# Altium PCB PCBII_COPY.PcbDoc (part 1 of 2)
Units mil, origin at the board's own origin, x right, y up, seen from the top; angles counter-clockwise.
Board outline 1365 x 1450 mil, 2 copper layers (Top Layer, Bottom Layer); 54 components, 41 nets, 198 pads, 63 vias.
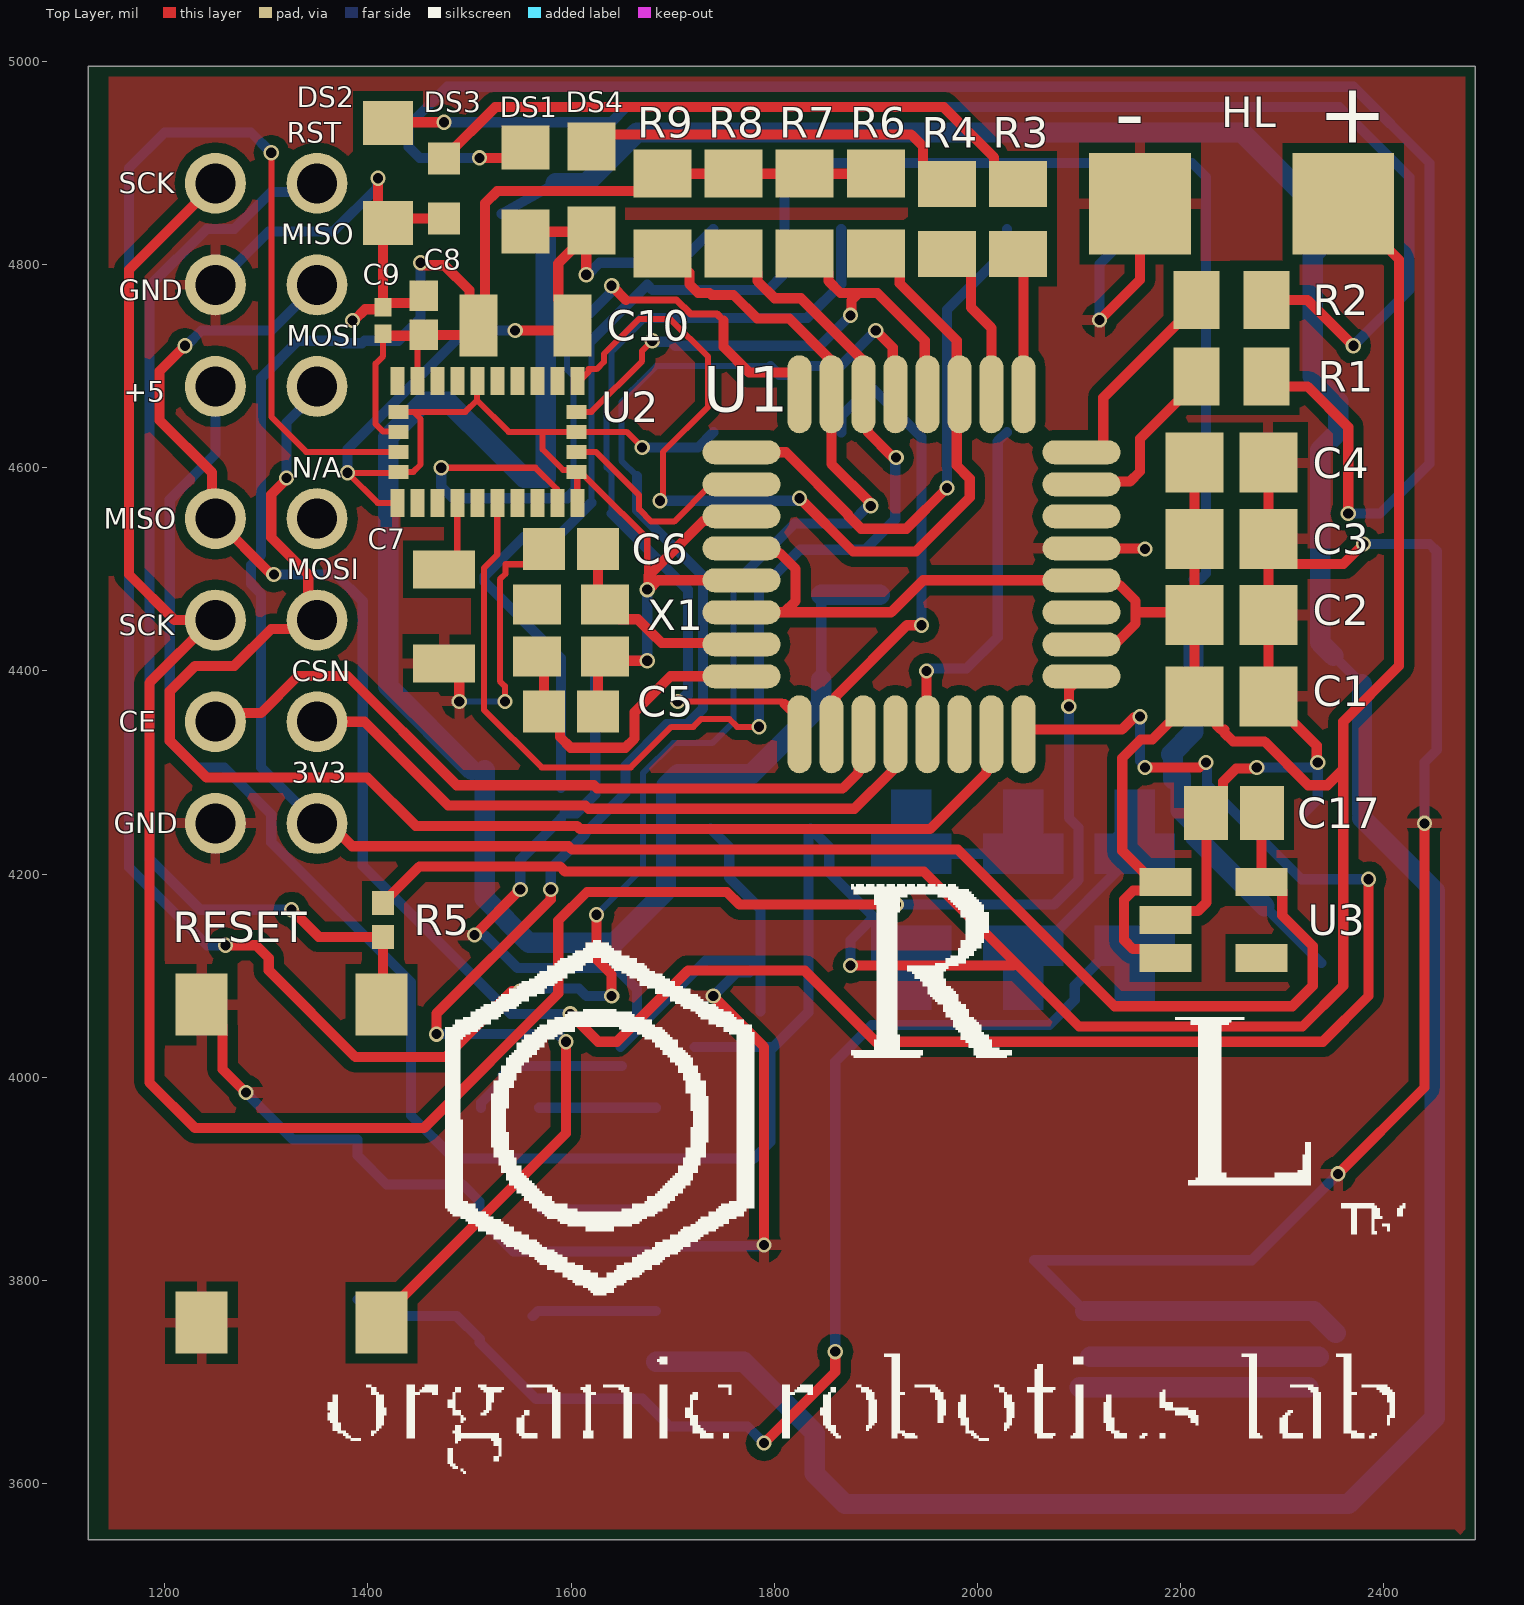
[diagram p0: Top Layer view]
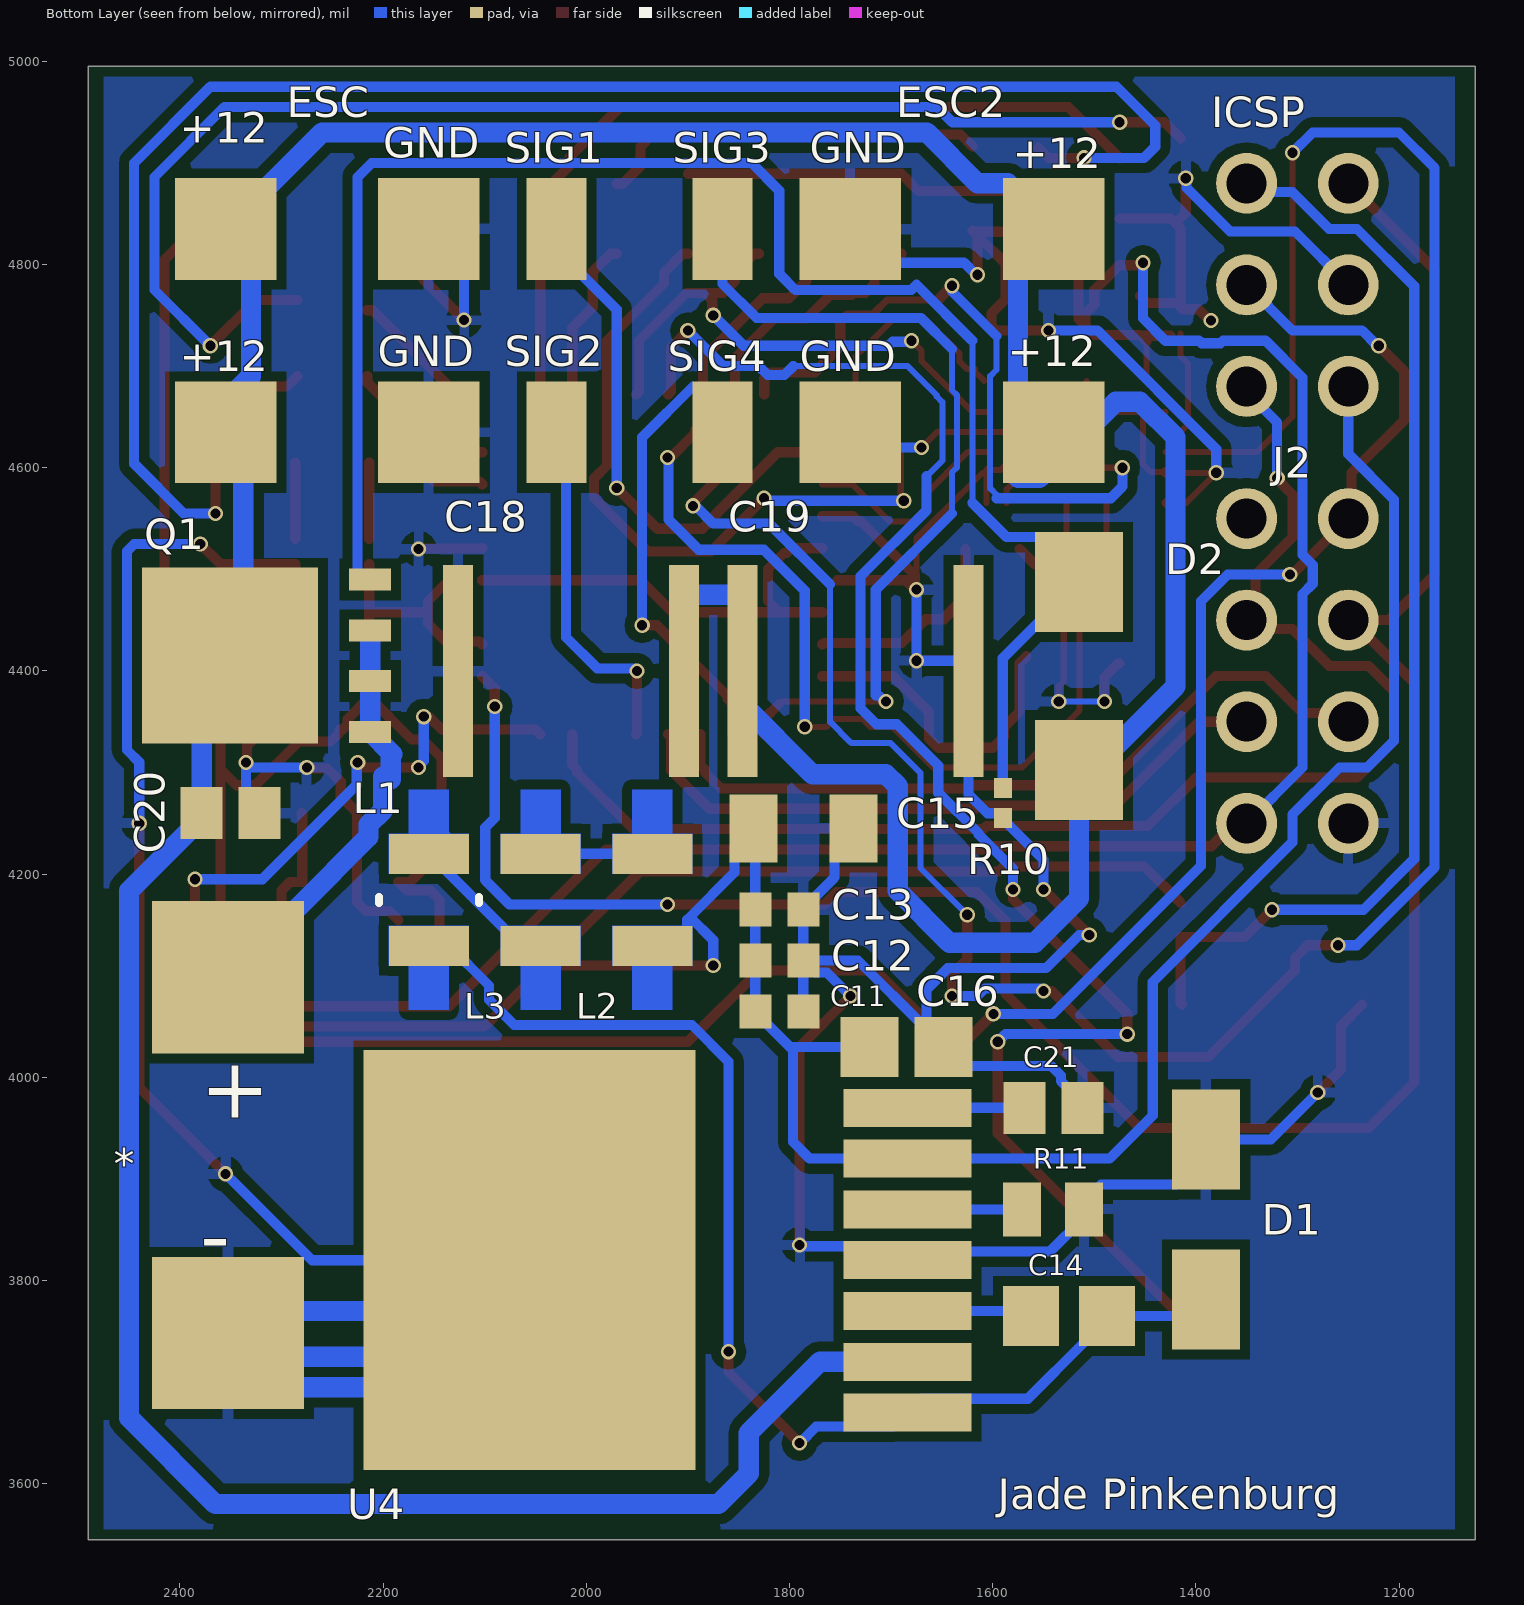
[diagram p1: Bottom Layer view, seen from below]

## Layer stack, top to bottom
Top Solder: solder mask 0.4, Solder Resist, Dk 3.5
Top Layer: signal copper 1.4
Dielectric 1: dielectric 12.6, FR-4, Dk 4.8
Bottom Layer: signal copper 1.4
Bottom Solder: solder mask 0.4, Solder Resist, Dk 3.5

## Board outline
2490,4995 2490,3545 1125,3545 1125,4995

## Design rules (kind name [scope] priority, off if disabled: settings)
Clearance [All] p1: gap=10 ignorepadtopadclearanceinfootprint=FALSE except(0: Arc-Hole Track-Hole SMDPad-Hole THPad-Hole Via-Hole Fill-Hole Poly-Hole Region-Hole Text-Hole; 5: Arc-Arc Arc-Track Arc-SMDPad Track-Track Track-SMDPad SMDPad-SMDPad)
MinimumSolderMaskSliver [All] p1: minsoldermaskwidth=3.5
PolygonConnect [All] p1: connectstyle=Relief reliefconductorwidth=10 reliefentries=4 polygonreliefangle="90 Angle" airgapwidth=10
RoutingVias [All] p1: holewidth=28 width=50 viastyle="Through Hole" minholewidth=28 minwidth=50 maxholewidth=28 maxwidth=50
SilkToSilkClearance [All] p1: silktosilkclearance=6
SilkToSolderMaskClearance [IsPad] p1: minsilkscreentomaskgap=6 clearancetoexposedcopper=TRUE
SolderMaskExpansion [All] p1: expansion=1
Width [All] p1: maxlimit=20 minlimit=5 preferedwidth=10 minimp=50.000000 maximp=50.000000 favimp=50.000000
27 further rules are at their usual default settings.

## Classes and differential pairs
component class [06]-Headers: * ESC ESC2 HL ICSP J2
component class [04]-Power: C11 C12 C13 C14 C15 C16 C17 C18 C19 C20 C21 D1 D2 L1 L2 L3 Q1 R10 R11 U3 U4
component class [03]-IMU: C7 C8 C9 C10 R6 R7 R8 R9 U2
component class [02]-IC: C1 C2 C3 C4 C5 C6 DS1 DS2 DS3 DS4 R1 R2 R3 R4 R5 RESET U1 X1

## Components (designator, comment, footprint, x,y, rotation, side; value= is the part's Value field where it differs from the comment)
* "Power Pads" Power_Switch 2360,3925 r90 bottom
C1 "0.1uF" CAPC2013X70X50ML10T25 2250,4375 r180 top
C2 "0.1uF" CAPC2013X70X50ML10T25 2250,4455 r180 top
C3 "0.1uF" CAPC2013X70X50ML10T25 2250,4530 r180 top
C4 "0.1uF" CAPC2013X70X50ML10T25 2250,4605 r180 top
C5 "22pF" CAPC1608X90X40ML10T20 1600,4360 r180 top
C6 "22pF" CAPC1608X90X40ML10T20 1600,4520 r180 top
C7 "C2012X7R2A104K125AA" CAPC2013X145X20ML20 1475,4453.74 r270 top
C8 "GRM155R71H123KA12D" CAPC1005X55X25ML05T10 1455,4750 r270 top value="120 nF"
C9 "GRM033R71A682KA01D" CAPC0603X33X15NL03T05 1415,4745 r270 top value="6.8 nF"
C10 "C2012X7R2A104K125AA" CAPC2013X145X20ML20 1555,4740 r180 top
C11 "10 uF" CAPC1608X90X38LL10T18 1810,4065 r180 bottom
C12 "10 uF" CAPC1608X90X38LL10T18 1810,4115 r180 bottom
C13 "10 uF" CAPC1608X90X38LL10T18 1810,4165 r180 bottom
C14 "10 nF" CAPC2013X70X45ML10T25 1525,3765 r180 bottom
C15 "150 uF" CAPC3216X180X50LL20T30 1786.38,4245 r180 bottom
C16 "0.1uF" CAPC2013X70X50ML10T25 1685,4030 r0 bottom
C17 "10uF" CAPC2013X145X50LL20T25 2252.56,4260 r0 top
C18 "15 uF" CAPC5750X280X20LL40 2015,4400 r180 bottom
C19 "15 uF" CAPC5750X280X20LL40 1735,4400 r0 bottom
C20 ".47 uF" CAPC2013X95X50LL10T25 2350,4260 r180 bottom
C21 "1 nF" CAPC2013X70X50LL10T25 1540,3970 r0 bottom
D1 "Diode" DIOD-SMA-2_A_V 1390,3860 r270 bottom
D2 "12V Zener Diode" FAIR-DO-214AA-2_V 1515,4395 r270 bottom
DS1 "BLUE LED" 0805_A 1555,4873.66 r90 top
DS2 "Orange" LTST-C171AKT_V 1420,4890 r270 top
DS3 "GREEN LED" LITE-ON-LTST-C191KRKT-2_V 1475,4875 r270 top
DS4 "Red Adj" LTST-C170KRKT_V 1620,4875 r270 top
ESC "ESCs" "ESC Pads" 2255,4735 r90 bottom
ESC2 "More ESCs" "ESC Pads" 1640,4735 r270 bottom
HL "Headlights" Headlamps 2260,4860 r0 top
ICSP "ICSP" ICSP 1300,4780 r90 bottom
J2 "Wifi" Wifi 1300,4500 r0 bottom
L1 "10 uH" MURA-LQH32CN100K53 2155,4174.72 r270 bottom
L2 "10 uH" MURA-LQH32CN100K53 1935,4174.72 r270 bottom
L3 "10 uH" MURA-LQH32CN100K53 2045,4174.72 r90 bottom
Q1 "P-FET 12V" NXP-SOT669_M 2315,4415 r0 bottom
R1 "270 Ohm" RESC2013X50X40NL20T20 2250,4690 r0 top
R2 "270 Ohm" RESC2013X50X40NL20T20 2250,4765 r0 top
R3 "270 Ohm" RESC2013X50X40NL20T20 2040,4845 r90 top
R4 "270 Ohm" RESC2013X50X40NL20T20 1970,4845 r90 top
R5 "1k" RESC1005X40X25NL05T10 1415,4155 r270 top
R6 "RC0805JR-0710KL" RESC2013X60X35ML10T20 1900,4850 r90 top
R7 "RC0805JR-0710KL" RESC2013X60X35ML10T20 1830,4850 r90 top
R8 "RC0805JR-0710KL" RESC2013X60X35ML10T20 1760,4850 r270 top
R9 "RC0805JR-0710KL" RESC2013X60X35ML10T20 1690,4850 r270 top
R10 "10k" RESC1005X40X25LL05T10 1590,4270 r90 bottom
R11 "8.2 k" RESC2013X50X40LL20T20 1540.51,3870 r0 bottom
RESET "Button" CKCP-PTS645S_V 1325,3915 r270 top
U1 "ATMEGA328P" 32A_M 1935,4505 r0 top
U2 "BNO055" BOSC-LGA-28_M 1517.6,4625.47 r0 top
U3 "3.3V Regulator" MF05A_M 2232.24,4155 r0 top
U4 "5V Buck" TS7B_N 1920,3820 r0 bottom
X1 "16MHz" AVX-CX2520DB_V 1600,4440 r0 top

## Footprints (in the part's own frame and the unit in brackets; to place one, negate y for a bottom-side part, rotate by r counter-clockwise, add the part's x,y. Pads: shape width x height; smd on the part's side, far side on the other; paste and mask are expansions set on the pad)
32A_M [mm] "Thin QFP, 32-Leads, Body 7x7mm, Pitch 0.8mm, IPC Low Density"
  oval 1.95x0.6 smd: 1(-4.25,2.8) 2(-4.25,2) 3(-4.25,1.2) 4(-4.25,0.4) 5(-4.25,-0.4) 6(-4.25,-1.2) 7(-4.25,-2) 8(-4.25,-2.8) 17(4.25,-2.8) 18(4.25,-2) 19(4.25,-1.2) 20(4.25,-0.4) 21(4.25,0.4) 22(4.25,1.2) 23(4.25,2) 24(4.25,2.8)
  oval 0.6x1.95 smd: 9(-2.8,-4.25) 10(-2,-4.25) 11(-1.2,-4.25) 12(-0.4,-4.25) 13(0.4,-4.25) 14(1.2,-4.25) 15(2,-4.25) 16(2.8,-4.25) 25(2.8,4.25) 26(2,4.25) 27(1.2,4.25) 28(0.4,4.25) 29(-0.4,4.25) 30(-1.2,4.25) 31(-2,4.25) 32(-2.8,4.25)
  body extent -3.5,-3.5 3.5,3.5, height 1.2
0805_A [mm] "Chip LED, 2-Leads, Body 2.0x1.3mm, IPC Medium Density"
  rect 1.1x1.2 smd: 1(-1.05,0) 2(1.05,0)
  body extent -1,-0.62 1,0.63, height 0.68
AVX-CX2520DB_V [mm] "SMD, 4-Leads, Body 2.5x2mm, Pitch 1.7mm"
  rect 1.2x1 smd: 1(-0.85,-0.65) 2(0.85,-0.65) 3(0.85,0.65) 4(-0.85,0.65)
  body extent -1.25,-1 1.25,1, height 0.55
BOSC-LGA-28_M [mm] "PQFN, 28-Leads, Body 5.20x3.80mm, Pitch 0.50mm, IPC Low Density"
  rect 0.35x0.7 smd: 1(-2.25,1.525) 6(-2.25,-1.525) 7(-1.75,-1.525) 8(-1.25,-1.525) 9(-0.75,-1.525) 10(-0.25,-1.525) 11(0.25,-1.525) 12(0.75,-1.525) 13(1.25,-1.525) 14(1.75,-1.525) 15(2.25,-1.525) 20(2.25,1.525) 21(1.75,1.525) 22(1.25,1.525) 23(0.75,1.525) 24(0.25,1.525) 25(-0.25,1.525) 26(-0.75,1.525) 27(-1.25,1.525) 28(-1.75,1.525)
  rect 0.5x0.35 smd: 2(-2.225,0.75) 3(-2.225,0.25) 4(-2.225,-0.25) 5(-2.225,-0.75) 16(2.225,-0.75) 17(2.225,-0.25) 18(2.225,0.25) 19(2.225,0.75)
  body extent -2.6,-1.9 2.6,1.9, height 1.18
CAPC0603X33X15NL03T05 [mm] "Chip Capacitor, 2-Leads, Body 0.60x0.30mm, IPC Medium Density"
  rect 0.46x0.42 smd: 1(-0.33,0) 2(0.33,0)
  body extent -0.31,-0.17 0.32,0.16, height 0.33
CAPC1005X55X25ML05T10 [mm] "Chip Capacitor, 2-Leads, Body 1.00x0.50mm, IPC Low Density"
  rect 0.76x0.72 smd: 1(-0.49,0) 2(0.49,0)
  body extent -0.53,-0.28 0.53,0.27, height 0.55
CAPC1608X90X38LL10T18 [mm] "Chip Capacitor, 2-Leads, Body 1.7x0.9mm, IPC High Density"
  rect 0.8x0.85 smd: 1(-0.6,0) 2(0.6,0)
  body extent -0.85,-0.45 0.85,0.45, height 0.9
CAPC1608X90X40ML10T20 [mm] "Chip Capacitor, 2-Leads, Body 1.7x0.9mm, IPC Low Density"
  rect 1.05x1.05 smd: 1(-0.675,0) 2(0.675,0)
  body extent -0.85,-0.45 0.85,0.45, height 0.9
CAPC2013X70X45ML10T25 [mm] "Chip Capacitor, 2-Leads, Body 2.00x1.25mm, IPC Low Density"
  rect 1.4x1.5 smd: 1(-0.95,0) 2(0.95,0)
  body extent -1.05,-0.67 1.05,0.67, height 0.7
CAPC2013X70X50LL10T25 [mm] "Chip Capacitor, 2-Leads, Body 2.10x1.35mm, IPC High Density"
  rect 1.05x1.3 smd: 1(-0.725,0) 2(0.725,0)
  body extent -1.05,-0.67 1.05,0.67, height 0.7
CAPC2013X70X50ML10T25 [mm] "Chip Capacitor, 2-Leads, Body 2.10x1.35mm, IPC Low Density"
  rect 1.45x1.5 smd: 1(-0.925,0) 2(0.925,0)
  body extent -1.05,-0.67 1.05,0.67, height 0.7
CAPC2013X95X50LL10T25 [mm] "Chip Capacitor, 2-Leads, Body 2.10x1.35mm, IPC High Density"
  rect 1.05x1.3 smd: 1(-0.725,0) 2(0.725,0)
  body extent -1.05,-0.68 1.05,0.67, height 0.95
CAPC2013X145X20ML20 [mm] "Chip Capacitor, 2-Leads, Body 2.20x1.45mm, IPC Low Density"
  rect 0.95x1.55 smd: 1(-1.175,0) 2(1.175,0)
  body extent -1.1,-0.72 1.1,0.72, height 1.45
CAPC2013X145X50LL20T25 [mm] "Chip Capacitor, 2-Leads, Body 2.00x1.25mm, IPC High Density"
  rect 1.1x1.35 smd: 1(-0.7,0) 2(0.7,0)
  body extent -1.1,-0.72 1.1,0.72, height 1.45
CAPC3216X180X50LL20T30 [mm] "Chip Capacitor, 2-Leads, Body 3.4x1.8mm, IPC High Density"
  rect 1.2x1.7 smd: 1(-1.25,0) 2(1.25,0)
  body extent -1.7,-0.9 1.7,0.9, height 1.8
CAPC5750X280X20LL40 [mm] "Chip Capacitors, 2-Leads, Body 6.1x5.4mm, IPC High Density"
  rect 0.75x5.3 smd: 1(-2.825,0) 2(2.825,0)
  body extent -3.05,-2.7 3.05,2.7, height 2.8
CKCP-PTS645S_V [mm] "THD, 4-Leads, Body 6x6mm, Pitch 4.5mm"
  rect 1.55x1.3 smd: 1(-3.975,2.25) 2(3.975,2.25) 3(-3.975,-2.25) 4(3.975,-2.25)
  body extent -4.5,-3 4.5,3, height 4.3
DIOD-SMA-2_A_V [mm] "SMA, 2-Leads, Body 4.3x2.605mm"
  rect 2.5x1.7 smd: 1(-2,0) 2(2,0)
  body extent -2.52,-1.46 2.52,1.46, height 2.4
"ESC Pads" [mm]
  rect 2.54x2.54 smd: 1(-2.54,2.54) 2(2.54,2.54) 3(-2.54,-2.54) 4(2.54,-2.54)
  rect 2.54x1.5 smd: 5(-2.54,-5.738) 6(2.54,-5.738)
FAIR-DO-214AA-2_V [mm] "Molded Diode, 2-Leads, Body 4.75x3.95mm"
  rect 2.5x2.2 smd: 1(-2.35,0) 2(2.35,0)
  body extent -2.59,-1.97 2.6,1.98, height 2.65
Headlamps [mil]
  rect 100x100 smd: 1(-100,0) 2(100,0)
ICSP [mil]
  round 60 hole 39.37: 1(-100,-50) 2(-100,50) 3(0,-50) 4(0,50) 5(100,-50) 6(100,50)
LITE-ON-LTST-C191KRKT-2_V [mm] "Chip, 2-Leads, Body 1.6x0.8mm"
  rect 0.8x0.8 smd: 1(-0.75,0) 2(0.75,0)
  body extent -0.8,-0.4 0.8,0.4, height 0.55
LTST-C170KRKT_V [mm] "SMD, 2-Leads, Body 2x1.25mm"
  rect 1.2x1.2 smd: 1(-1.05,0) 2(1.05,0)
  body extent -1,-0.63 1,0.63, height 1.2
LTST-C171AKT_V [mm] "SMD, 2-Leads, Body 2x1.25mm"
  rect 1.1x1.25 smd: 1(-1.25,0) 2(1.25,0)
  body extent -1,-0.63 1,0.63, height 0.8
MF05A_M [mm] "SOT23, 5-Leads, Body 2.9x1.6mm, Pitch 0.95mm, Lead Span 2.8mm, IPC Low Density"
  rect 1.3x0.7 smd: 1(-1.2,0.95) 2(-1.2,0) 3(-1.2,-0.95) 4(1.2,-0.95) 5(1.2,0.95)
  body extent -0.83,-1.49 0.83,1.5, height 1.19
MURA-LQH32CN100K53 [mm] "SMD, 2-Leads, Body 3.2x2.5mm"
  rect 1x2 smd: 1(-1.15,0) 2(1.15,0)
  Top Layer region: -1.65,1 -0.65,1 -0.65,-1 -1.65,-1 -1.65,-0.5 -2.75,-0.5 -2.75,0.5 -1.65,0.5
  Top Layer region: 1.65,-1 0.65,-1 0.65,1 1.65,1 1.65,0.5 2.75,0.5 2.75,-0.5 1.65,-0.5
  silkscreen extent -0.08,-1.25 0.08,1.25, body extent -1.6,-1.25 1.6,1.25, height 1.7
NXP-SOT669_M [mm] "DPAK, 4-Leads, Body 5x4.1mm, Pitch 1.27mm, IPC Low Density"
  rect 1.05x0.55 smd: 1(-2.6,1.905) 2(-2.6,0.635) 3(-2.6,-0.635) 4(-2.6,-1.905)
  rect 4.4x4.4 smd: 5(0.9,0)
  body extent -1.9,-2.5 2.2,2.5, height 1.2
Power_Switch [mil]
  rect 150x150 smd: 1(-176.66,-7.4) 2(173.34,-7.4)
RESC1005X40X25LL05T10 [mm] "Chip Resistor, 2-Leads, Body 1.00x0.50mm, IPC High Density"
  rect 0.5x0.45 smd: 1(-0.375,0) 2(0.375,0)
  body extent -0.53,-0.27 0.53,0.28, height 0.4
RESC1005X40X25NL05T10 [mm] "Chip Resistor, 2-Leads, Body 1.00x0.50mm, IPC Medium Density"
  rect 0.6x0.55 smd: 1(-0.425,0) 2(0.425,0)
  body extent -0.53,-0.27 0.53,0.28, height 0.4
RESC2013X50X40LL20T20 [mm] "Chip Resistor, 2-Leads, Body 2.00x1.25mm, IPC High Density"
  rect 0.95x1.35 smd: 1(-0.775,0) 2(0.775,0)
  body extent -1.1,-0.72 1.1,0.72, height 0.5
RESC2013X50X40NL20T20 [mm] "Chip Resistor, 2-Leads, Body 2.00x1.25mm, IPC Medium Density"
  rect 1.15x1.45 smd: 1(-0.875,0) 2(0.875,0)
  body extent -1.1,-0.72 1.1,0.72, height 0.5
RESC2013X60X35ML10T20 [mm] "Chip Resistor, 2-Leads, Body 2.1x1.35mm, IPC Low Density"
  rect 1.2x1.45 smd: 1(-1,0) 2(1,0)
  body extent -1.05,-0.68 1.05,0.67, height 0.6
TS7B_N [mm] "D2-PAK, 8-Leads, Body 8.6x10.2mm, Pitch 1.27mm, Lead Span 14.1mm, IPC Medium Density"
  rect 3.2x0.95 smd: 1(-6,3.81) 2(-6,2.54) 3(-6,1.27) 4(-6,0) 5(-6,-1.27) 6(-6,-2.54) 7(-6,-3.81)
  rect 8.3x10.5 smd: 8(3.45,0)
  body extent -2.65,-5.2 6.24,5.2, height 4.64
Wifi [mil]
  round 60 hole 39.37: 1(-50,250) 2(50,250) 3(-50,150) 4(50,150) 5(-50,50) 6(50,50) 7(-50,-50) 8(50,-50)

## Part data
C1 C2 C3 C4 C16: library part CMP-2000-05001-1, "Chip Capacitor, 0.1 uF, -20% to 80%, 50 V, -30 to 85 degC, 0805 (2012 Metric), RoHS, Tape and Reel", Capacitance=0.1µF, Manufacturer=Yageo, MPN=CC0805ZRY5V9BB104, Operating Temperature=-30degC~85degC, Package / Case=0805(2012Metric), Package Description="2-Pin Surface Mount Device, Body 2 x 1.25 mm", Package Reference="0805 (2012 Metric)", Ratings=-, Standard Package=1, Temperature Coefficient=Y5V(F), Tolerance=-20%,+80%, Voltage - Rated=50V, Applications=GeneralPurpose, Catalog Drawings=CC_0805_0.6, Category=Capacitors, Datasheet URL=http://download.siliconexpert.com/pdfs/2012/8/14/1/40/50/201/yageo_/manual/upy-gphc_y5v_6.3v-to-50v_5_revised.pdf, Datasheet Version="Rev. 5, 07/2010", Family=CeramicCapacitors, Featured Product=CommodityMultilayerCeramicCapacitors–CCSeries, Features=-, Height - Seated (Max)=-, Lead Spacing=-, Lead Style=-, Manufacturer URL=http://www.yageo.com/, Mounting Type=SurfaceMount,MLCC, Online Catalog=CCSeries, Other Names=311-1361-6, Packaging=Digi-Reel, Series=CC
C5 C6: library part CMP-1659-00006-3, "Chip Capacitor, 22 pF, +/- 5%, 50 V, -55 to 125 degC, 0603 (1608 Metric), RoHS, Tape and Reel", Manufacturer=Yageo, Max Operating Temperature="125 degC", Min Operating Temperature="-55 degC", MPN=CC0603JRNP09BN220, DatasheetVersion="Rev. 13, 05/2016", Length="1.6 mm", Mount="Surface Mount", Mounting Technology="Surface Mount", PackageDescription="2-Pin Surface Mount Device, Body 1.6 x 0.8 mm", PackageReference=0603, RoHSCompliant=true
C7 C10: library part CMP-2000-05453-1, "Chip Capacitor, 100 nF, +/- 10%, 100 V, -55 to 1255 degC, 0805 (2012 Metric), RoHS, Tape and Reel", Capacitance=0.1µF, Manufacturer=TDK, Operating Temperature=-55degC~125degC, Package / Case=0805(2012Metric), Package Description="2-Pin Surface Mount Device, Body 2 x 1.25 mm", Package Reference=805, PCN Part Number=MLCCPartNumberChange30/Nov/2012, Ratings=-, Standard Package=1, Temperature Coefficient=X7R, Tolerance=±10%, Voltage - Rated=100V, Applications=GeneralPurpose, Catalog Drawings=CSERIES_2012-0805_1.45, Category=Capacitors, Datasheet URL=https://datasheet.ciiva.com/11788/0900766b80fc5cba-11788142.pdf, Datasheet Version=Jul-13, Family=CeramicCapacitors, Featured Product=C-SeriesMidVoltageMLCCs, Features=-, Height - Seated (Max)=-, Kits=SAMPLEKIT1008-ND-KITCAPCERMLCC100V-630V, Lead Spacing=-, Lead Style=-, Manufacturer URL=http://www.tdk.com/, Mounting Type=SurfaceMount,MLCC, Online Catalog=CSeries,MidVoltage, Other Names=445-1418-1, Packaging=CutTape(CT), Product Training Modules=HighCapacitanceReplacementSEAT,CCV,andTVCLDesignToolsGuidetoReplacinganElectrolyticCapacitorwithanMLCC, RoHS Information=RoHSCertificate-MLCC, Series=C, Size / Dimension="0.079\"Lx0.049\"W(2.00mmx1.25mm)", Thickness (Max)="0.057\"(1.45mm)"
C8: library part CMP-2008-03957-1, "120 nF Capacitor", Manufacturer=Murata, Part Number=GRM155R71H123KA12D
C9: library part CMP-2010-01688-1, Manufacturer=Murata, Part Number=GRM033R71A682KA01D
C11 C12 C13: library part CMP-2000-07518-1, "Chip Capacitor, 10 uF, +/- 10%, 6.3 V, -55 to 85 degC, 0603 (1608 Metric), RoHS, Tape and Reel", Capacitance=10uF, Case/Package=0603, Case Code (Metric)=1608, Dielectric=X5R, Manufacturer=Murata, Max Operating Temperature=85degC, Min Operating Temperature=-55degC, MPN=GRM188R60J106KE47D, Package Description="2-Pin Surface Mount Device, Body 1.6 x 0.8 mm", Package Quantity=4000, Package Reference=603, Tolerance=10%, Voltage Rating=6.3V, Case Code (Imperial)=0603, Datasheet URL=http://search.murata.co.jp/Ceramy/image/img/A01X/G101/ENG/GRM188R60J106KE47-02.pdf, Datasheet Version=03/2016, Depth=0.8mm, Height=0.8mm, Length=1.6mm, Manufacturer URL=http://www.murata.com/, Material=Ceramic, Mount=SurfaceMount, Mounting Technology=SurfaceMount, Packaging=TapeandReel, REACH SVHC=NoSVHC, RoHSCompliant=True, Termination=SMD/SMT, Thickness=0.035inch, Voltage Rating (DC)=6.3V, Weight=0.000222oz, Width=0.031inch
C14: library part CMP-2000-05013-1, "Chip Capacitor, 10 nF, +/- 10%, 50 V, -55 to 125 degC, 0805 (2012 Metric), RoHS, Tape and Reel", Capacitance=0.01uF, Capacitance - nF=10nF, Capacitance - pF=10000pF, Case Code - in=0805, Case Code - mm=2012, Case Height=0.6mm, Case Length=2mm, Case Width=1.25mm, Dielectric=X7R, Manufacturer=Murata, Maximum Operating Temperature=+125C, Minimum Operating Temperature=-55C, MPN=GRM216R71H103KA01D, Operating Temperature Range=-55Cto+125C, Package / Case=0805(2012metric), Temperature Coefficient / Code=+/-15%, Tolerance=10%, Voltage Rating=50V, Brand=MurataElectronics, Datasheet URL=https://datasheet.ciiva.com/29201/452521-da-01-en-vs-kondensator-0805-29201121.pdf, Datasheet Version=Dec-10, Dimensions=1.25mmWx2mmLx0.6mmH, Factory Pack Quantity=4000, Manufacturer URL=http://www.murata.com/, Packaging=Reel, Product=GeneralTypeMLCCs, Product Category=MultilayerCeramicCapacitorsMLCC-SMD/SMT, RoHS=Details, Series=GRM, Termination Style=SMD/SMT, Type=GeneralPurposeMLCC, URL=https://www.digikey.com/product-detail/en/murata-electronics/GRM216R71H103KA01D/490-1664-1-ND/587472, Voltage Rating DC=50V
C15: library part CMP-2000-06109-1, "Chip Capacitor, 10 uF, +/- 10%, 35 V, 1206 (3216 Metric), RoHS, Tape and Reel", Capacitance=150µF, Manufacturer="Samsung Electro-Mechanics", MPN=CL32A157MQVNNNE, Operating Temperature=-55°C~85°C, Package / Case=1210(3225Metric), Package Description="2-Pin Surface Mount Device, Body 3.2 x 1.6 mm", Package Reference=1206, Ratings=-, Standard Package=1,000, Temperature Coefficient=X5R, Tolerance=±20%, Voltage - Rated=6.3V, Applications=GeneralPurpose, Category=Capacitors, Datasheet URL=http://www.samsungsem.com/kr/support/product-search/mlcc/__icsFiles/afieldfile/2016/08/18/S_CL31B106KLHNNNE.pdf, Datasheet Version=07/2016, Family=CeramicCapacitors, Featured Product=Multi-LayerCeramicCapacitors, Features=-, Height - Seated (Max)=-, Lead Spacing=-, Lead Style=-, Manufacturer URL=http://www.samsungsem.com/global/index.jsp, Mounting Technology=SurfaceMount, Mounting Type=SurfaceMount,MLCC, Online Catalog=CLSeries,HighCapacitance, Other Names=1276-3367-2, Packaging=Tape&Reel(TR), Product Training Modules=HighCapMLCCFamily, RoHS Information=MLCCRoHS2Compliance, Series=CL, Size / Dimension="0.126\"Lx0.098\"W(3.20mmx2.50mm)", Thickness (Max)="0.110\"(2.80mm)"
C17: library part CMP-2000-06077-1, "Chip Capacitor, 10 uF, +/- 10%, 10 V, -55 to 85 degC, 0805 (2012 Metric), RoHS, Tape and Reel", Capacitance=10µF, Manufacturer=Yageo, Operating Temperature=-55°C~85°C, Package / Case=0805(2012Metric), Package Description="2-Pin Surface Mount Device, Body 2 x 1.25 mm", Package Reference=0805, Ratings=-, Standard Package=1, Temperature Coefficient=X5R, Tolerance=±10%, Voltage - Rated=10V, Applications=GeneralPurpose, Category=Capacitors, Datasheet URL=http://www.yageo.com/documents/recent/UPY-GPHC_X5R_4V-to-50V-21.pdf, Datasheet Version="Rev. 21, 01/2016", Family=CeramicCapacitors, Featured Product=Yageo-HighCapacitanceMLCC, Features=-, Height - Seated (Max)=-, Lead Spacing=-, Lead Style=-, Manufacturer URL=http://www.yageo.com/, Mounting Technology=SurfaceMount, Mounting Type=SurfaceMount,MLCC, Online Catalog=CCSeries, Other Names=311-1460-6, Packaging=Digi-Reel®, Series=CC, Thickness (Max)=-
C18 C19: library part CMP-2000-07446-1, "Chip Capacitor, 15 uF, +/- 20%, 100 V, -55 to 125 degC, 2220 (5750 Metric), RoHS, Tape and Reel", Capacitance=15uF, Case/Package=2220, Case Code (Metric)=5750, Dielectric=X7S, Manufacturer=TDK, Max Operating Temperature=125degC, Min Operating Temperature=-55degC, MPN=CGA9P3X7S2A156M250KB, Package Description="2-Pin Surface Mount Device, Body 5.7 x 5 mm", Package Quantity=1, Tolerance=20%, Voltage Rating=100V, Case Code (Imperial)=2220, Composition=Ceramic, Datasheet URL=https://product.tdk.com/info/en/catalog/datasheets/mlcc_automotive_midvoltage_en.pdf, Datasheet Version=03/2015, Depth=5mm, Height=2.3mm, Lead Free=LeadFree, Length=5.7mm, Manufacturer URL=http://www.tdk.com/, Mounting Technology=SurfaceMount, Package Reference=2220, Packaging=TapeandReel, REACH SVHC=NoSVHC, RoHSCompliant=True, Termination=SMD/SMT, Thickness=0.098inch, Voltage Rating (DC)=100V, Weight=0.016932oz, Width=0.197inch
C20: library part CMP-1660-00002-3, "Chip Capacitor, 0.47 uF, +/- 10%, 16 V, -55 to 125 degC, 0805 (2012 Metric), RoHS, Tape and Reel", Manufacturer="Taiyo Yuden", Max Operating Temperature="125 degC", Min Operating Temperature="-55 degC", MPN=EMK212B7474KD-T, Package Quantity=4000, Voltage Rating="16 V", DatasheetVersion=06/2014, Height="0.85 mm", Length="2 mm", Mount="Surface Mount", Mounting Technology="Surface Mount", PackageDescription="2-Pin Surface Mount Device, Body 2 x 1.25 mm", PackageReference="0805 (2012 Metric)", Packaging="Tape and Reel", REACH SVHC=Unknown, RoHSCompliant=true, URL=https://www.digikey.com/product-detail/en/taiyo-yuden/EMK212B7474KD-T/587-1282-1-ND/931059
C21: library part CMP-2000-06078-1, "Chip Capacitor, 1 nF, +/- 10%, 50 V, -55 to 125 degC, 0805 (2012 Metric), RoHS, Tape and Reel", Capacitance=1000pF, Manufacturer=Yageo, MPN=CC0805KRX7R9BB102, Operating Temperature=-55°C~125°C, Package / Case=0805(2012Metric), Package Description="2-Pin Surface Mount Device, Body 2 x 1.25 mm", Package Reference="0805 (2012 Metric)", Ratings=-, Standard Package=1, Temperature Coefficient=X7R, Tolerance=±10%, Voltage - Rated=50V, Applications=GeneralPurpose, Catalog Drawings=CC_0805_0.6, Category=Capacitors, Datasheet URL=http://www.yageo.com/documents/recent/UPY-GPHC_X7R_6.3V-to-50V_14.pdf, Datasheet Version="Rev. 14, 05/2016", Family=CeramicCapacitors, Featured Product=CommodityMultilayerCeramicCapacitors–CCSeries, Features=-, Height - Seated (Max)=-, Lead Spacing=-, Lead Style=-, Manufacturer URL=http://www.yageo.com/, Mounting Technology=SurfaceMount, Mounting Type=SurfaceMount,MLCC, Online Catalog=CCSeries, Other Names=311-1127-6, Packaging=Digi-Reel®, Product Training Modules=MultilayerCeramicCapacitors, Series=CC, Size / Dimension="0.079\"Lx0.049\"W(2.00mmx1.25mm)", Thickness (Max)="0.024\"(0.60mm)"
D1: library part CMP-2000-05897-1, "Schottky Barrier Rectifier, 50 V, 3 A, -55 to 150 degC, 2-Pin SMD, RoHS, Tape and Reel", If - Forward Current=3A, Ifsm - Forward Surge Current=80A, Ir - Reverse Current=500uA, Manufacturer=DiodesIncorporated, Maximum Operating Temperature=+125C, Minimum Operating Temperature=-55C, MPN=B350A-13-F, Operating Temperature Range=-55Cto+125C, Package / Case=SMA, Package Description="2-Pin Surface Mount Device, Body 4.3 x 2.605 mm", Package Reference=SMA-2, Vf - Forward Voltage=0.7V, Vrrm - Repetitive Reverse Voltage=50V, Brand=DiodesIncorporated, Configuration=Single, Datasheet URL=http://www.diodes.com/_files/datasheets/ds30891.pdf, Datasheet Version="Rev. 17-2, 09/2015", Factory Pack Quantity=5000, Height=2.3mm, Length=4.6mm, Manufacturer URL=http://www.diodes.com/, Mounting Style=SMD/SMT, Mounting Technology=SurfaceMount, Packaging=Reel, Product=SchottkyDiodes, Product Category=SchottkyDiodes&Rectifiers, RoHS=True, Series=B350, Technology=Si, Termination Style=SMD/SMT, Type=SchottkyBarrierRectifier, Unit Weight=0.002258oz, URL=https://www.digikey.com/product-detail/en/diodes-incorporated/B350A-13-F/B350A-FDICT-ND/751529, Width=2.92mm
D2: library part CMP-2000-07093-1, "Transient Voltage Suppressor Diode, 600 W, -55 to 150 degC, 2-Pin SMB (DO-214AA), RoHS, Tape and Reel", Capacitance @ Frequency=-, Current - Peak Pulse (10/1000µs)=30.2A, Manufacturer="Fairchild Semiconductor", MPN=SMBJ12A, Operating Temperature=-55°C~150°C(TJ), Package / Case=DO-214AA,SMB, Package Description="2-Pin Surface Mount Device, Body 4.4 x 3.625 mm", Package Reference=DO-214AA-2, Power - Peak Pulse=600W, Power Line Protection=No, Standard Package=1, Supplier Device Package=DO-214AA(SMB), Voltage - Breakdown (Min)=13.3V, Voltage - Clamping (Max) @ Ipp=19.9V, Voltage - Reverse Standoff (Typ)=12V, Applications=GeneralPurpose, Bidirectional Channels=-, Category=CircuitProtection, Datasheet URL=http://www.mouser.com/ds/2/149/SMBJ12A-196559.pdf, Datasheet Version="Rev. 1.1.1, 11/2014", EDA / CAD Models=DownloadfromAcceleratedDesigns, Family=TVS-Diodes, Manufacturer URL=https://www.fairchildsemi.com/, Mounting Technology=SurfaceMount, Mounting Type=SurfaceMount, Online Catalog=SMBJSeries, Other Names=SMBJ12AFSDKR, Packaging=Digi-Reel®, Series=SMBJ, Type=Zener, Unidirectional Channels=1, URL=https://www.digikey.com/product-detail/en/littelfuse-inc/SMBJ12A/SMBJ12ALFCT-ND/285971
DS1: library part CMP-1426-00008-1, "SMD mono-color Chip LED, WL-SMCW, Blue", Color=Blue, Manufacturer="Wuerth Elektronik", PartNumber=150080BS75000, ComponentLink1Description="Manufacturer URL", ComponentLink1URL=http://www.we-online.com, ComponentLink2Description=Datasheet, ComponentLink2URL=http://katalog.we-online.com/led/datasheet/150080BS75000.pdf, PackageReference=0805_A
DS2: library part CMP-1674-00004-5, "LED Uni-Color Orange, 100 mW, 120 mA, -55 to 85 degC, 2-Pin SMD, RoHS, Tape and Reel", Manufacturer=Lite-On, Max Operating Temperature="85 degC", Min Operating Temperature="-55 degC", MPN=LTST-C171AKT, Package Quantity=3000, Colour=Orange, ComponentLink1Description="Manufacturer URL", ComponentLink1URL=http://www.us.liteon.com/, ComponentLink2Description=Datasheet, ComponentLink2URL=http://optoelectronics.liteon.com/upload/download/DS-22-99-0170/S_110_LTST-C171AKT.pdf, DatasheetVersion=03/2014, Height="0.8 mm", Length="2 mm", Mount="Surface Mount", Mounting Technology="Surface Mount", PackageDescription="2-Pin Surface Mount Device, Body 2 x 1.25 mm", PackageReference=C171AKT, Packaging="Tape and Reel", Pins=2, RoHSCompliant=true
DS3: library part CMP-2000-05198-1, "Chip LED, Green, 574 nm, 40 pF, -55 to 85 degC, 2-Pin SMD, RoHS, Tape and Reel", Emitting Color=YellowGreen, Forward Current=30mA, Forward Voltage=2.4V, Manufacturer=Lite-On, MPN=LTST-C191KGKT, Operating Temperature Classification=Industrial, Operating Temp Range=-55Cto85C, Package Type=ChipLed, Power Dissipation=75W, Reverse Voltage=5V, Test Current (It)=20mA, Chip Material=AlGaInP, Datasheet URL=http://download.siliconexpert.com/pdfs/2007/08/26/semi_b/manual/lot/ds/ltst-c191kgkt.pdf, Datasheet Version=Jan-07, DELETED=Compliant, Dominant Wave Length=571nm, High Brightness=Yes, Lens Dimensions=1.1X0.8X0.37mm, Luminous Intensity=35mcd, Lum Intensity=35mcd, Main Category=ChipLED, Manufacturer URL=http://www.us.liteon.com/, Mounting=SurfaceMount, Number of Elements=1, Packaging=TapeandReel, Peak Wavelength=574nm, Pin Count=2, Product Depth (mm)=0.8mm, Product Height (mm)=0.55mm, Product Length (mm)=1.6mm, Rad Hardened=No, Shape Type=Rectangular, Type=Uni-Color, Viewing Angle=130deg
DS4: library part CMP-2000-07593-1, "LED Red, 75 mW, 54 mcd, -55 to 85 degC, 2-Pin SMD, RoHS, Tape and Reel", Case\/Package=0805, Case Code (Metric)=2012, Colour=Red, Forward Current=30mA, Forward Voltage=2V, Lens Colour=Colorless, Manufacturer=Lite-On, Max Operating Temperature=85degC, Min Operating Temperature=-55degC, Package Description="2-Pin Surface Mount Device, Body 2 x 1.25 mm", Package Quantity=1, Package Reference=C170KRKT, Power Dissipation=75mW, Test Current=20mA, Case Code (Imperial)=0805, Datasheet URL=http://optoelectronics.liteon.com/upload/download/DS-22-99-0150/LTST-C170KRKT.pdf, Datasheet Version="Rev. D, 11/2014", Depth=1.6mm, Dominant Wavelength=631nm, Height=1.1mm, Illumination Colour=Red, Lead Free=LeadFree, Length=3.2mm, Lens Style=Rectangular, Lens Transparency=Clear, Luminous Intensity=54mcd, Manufacturer URL=http://www.us.liteon.com/, Mount=SurfaceMount, Mounting Technology=SurfaceMount, Number of Elements=1, Number of LEDs=1, Number of Pins=2, Packaging=TapeandReel, Power Rating=75mW, Radiation Hardening=No, RoHSCompliant=True, Viewing Angle=130degrees, Wavelength=639nm, Width=1.25mm
ESC2: library part ESCs
L1 L2 L3: library part CMP-2000-06583-1, "Inductor, 10 uH, +/- 10%, 450 mA, -40 to 85 degC, 2-Pin SMD, RoHS, Tape and Reel", Current Rating=450mA, DC Resistance (DCR)=390mOhmMax, Frequency - Self Resonant=26MHz, Frequency - Test=1MHz, Inductance=10µH, Manufacturer=Murata, MPN=LQH32CN100K53L, Operating Temperature=-40°C~85°C, Package / Case=1210(3225Metric), Package Description="2-Pin Surface Mount Device, Body 3.2 x 2.5 mm", Package Reference=LQH32CN100K53, Standard Package=2,000, Tolerance=±10%, Catalog Drawings=LQH32C_53SeriesSideLQH32C_53SeriesEndLQH32C_53SeriesTop, Category=Inductors,Coils,Chokes, Datasheet URL=http://psearch.en.murata.com/inductor/product/LQH32CN100K53_.pdf, Datasheet Version=10/2016, Family=FixedInductors, Height - Seated (Max)="0.067\"(1.70mm)", Manufacturer URL=http://www.murata.com/, Material - Core=Ferrite, Mounting Technology=SurfaceMount, Mounting Type=SurfaceMount, Online Catalog=LQHSeries, Other Names=490-4059-2, Packaging=Tape&Reel(TR), Product Training Modules=InductorProducts, Series=LQH32C_53, Shielding=Unshielded, Size / Dimension="0.126\"Lx0.098\"W(3.20mmx2.50mm)", Type=Wirewound
Q1: library part CMP-1258-00324-1, "N-Channel Logic Level MOSFET, 80 V, 25 A, 5-Pin SOT669, Tape and Reel", Manufacturer="NXP Semiconductors", MPN=PSMN041-80YLX, Channel Type=N, Ciss [typ] (pF)=1180, Code_JEDEC=MO-235, ComponentLink1Description="Manufacturer URL", ComponentLink1URL=http://www.nxp.com/, ComponentLink2Description=Datasheet, ComponentLink2URL=http://www.nxp.com/documents/data_sheet/PSMN041-80YL.pdf, ComponentLink3Description="Package Specification", ComponentLink3URL=http://www.nxp.com/documents/outline_drawing/sot669_po.pdf, Coss [typ] (pF)=99, ID [max] (A)=25, Mounting Technology="Surface Mount", PackageDescription="4-Pin Plastic Single-ended Surface Mounted Package, Body 4.9 x 3.95 mm, Pitch 1.27 mm", PackageReference=SOT669, PackageVersion="13-02-27, 02/2013", Packing="Tape & Reel", PartNumber=PSMN041-80YLX, Qr [typ] (nC)=22, URL=https://www.digikey.com/product-detail/en/nexperia-usa-inc/PSMN041-80YLX/1727-1507-1-ND/4486641, VDS [max] (V)=80, VGSth [typ] (V)=1.7
R1 R2 R3 R4: library part CMP-2001-03354-1, "270 Ohm Resistor", Manufacturer=Susumu, Part Number=RR1220P-271-D
R5: library part CMP-2002-07472-1, Manufacturer="Yageo / Phycomp", MPN=RC0402FR-071KL
R6 R7 R8 R9: library part CMP-2000-05025-1, "Chip Resistor, 10 KOhm, +/- 5%, 0.125 W, -55 to 155 degC, 0805 (2012 Metric), RoHS, Tape and Reel", Manufacturer=Yageo, Package Description="2-Pin Surface Mounted Device, Body 2 x 1.25 mm", Package Reference=805, Power Rating=250mW, Resistance=10k, Resistance Tolerance=±5%, Resistor Case Style=0805[2012Metric], Resistor Element Type=ThickFilm, Temperature Coefficient=±100ppm/degC, Voltage Rating=150V, Automotive Qualification Standard=-, Datasheet URL=http://www.yageo.ru/pdf/RC0805.pdf, Datasheet Version="REV. 2, 09/2004", Manufacturer URL=http://www.yageo.com/, MSL=MSL1-Unlimited, Packaging=CutTape, Product Range=RCSeries, SVHC=ToBeAdvised
R10: library part CMP-2002-07353-1, Manufacturer="Yageo / Phycomp", MPN=RC0402FR-0710KL, Part Number=RC0402FR-0710KL, URL=https://www.digikey.com/product-detail/en/yageo/RC0402FR-0710KL/311-10.0KLRCT-ND/729470
R11: library part CMP-2001-03516-1, Manufacturer=Susumu, MPN=RR1220P-822-D, URL=https://www.digikey.com/product-detail/en/susumu/RR1220P-822-D/RR12P8.2KDCT-ND/432852
RESET: library part CMP-2000-07594-1, "Tact Switch, SPST-NO, 50 mA, -20 to 60 degC, 4-Pin SMD, RoHS, Tape and Reel", Case\/Package=SMD/SMT, Colour=Black, Contact Resistance=100mOhm, Current Rating=50mA, Manufacturer="C&K Components", Max Operating Temperature=60degC, Max Voltage Rating (DC)=12V, Min Operating Temperature=-20degC, MPN="PTS645SM43SMTR92 LFS", Operating Force=160gf, Package Description="4-Pin Surface Mount Device, Body 6 x 6 mm, Pitch 4.5 mm", Package Quantity=1000, Package Reference=PTS645S, Actuator Length=0.85mm, Actuator Material=Polyamide, Contact Material=Silver, Contact Plating=Silver, Datasheet URL=http://www.ckswitches.com/media/1471/pts645.pdf, Datasheet Version=04/2016, Depth=9mm, Illumination Type=Illuminated, Lead Free=LeadFree, Length=6mm, Manufacturer URL=http://www.ckswitches.com/, Max Current Rating=50mA, Mechanical Life=100000Cycles, Mount=SurfaceMount, Mounting Technology=SurfaceMount, Orientation=Straight, Packaging=TapeandReel, REACH SVHC=NoSVHC, RoHSCompliant=True, Switch Function=Off-Mom, Termination=GullWing, Throw Configuration=SPST, Voltage Rating (DC)=12V
U1: library part CMP-0095-00269-2, "8-bit AVR Microcontroller, 32KB Flash, 1KB EEPROM, 2KB SRAM, 32-pin TQFP, Industrial Grade (-40°C to 85°C)", Manufacturer="Microchip Technology", MPN=ATmega328P-AU, Code_JEDEC=MS-026-ABA, ComponentLink1Description="Manufacturer URL", ComponentLink1URL=http://www.atmel.com/, ComponentLink2Description="ATmega48A/48PA/88A/88PA/168A/168PA/328/328P Datasheet", ComponentLink2URL=http://www.atmel.com/dyn/resources/prod_documents/doc8271.pdf, ComponentLink3Description="ATmega48A/48PA/88A/88PA/168A/168PA/328/328P Summary", ComponentLink3URL=http://www.atmel.com/dyn/resources/prod_documents/8271S.pdf, DatasheetVersion="revD, May-2011", PackageDescription="32-Lead, 7x7x1.0 mm Body, 0.8mm Lead Pitch, Thin Profile Plastic Quad Flat Package (TQFP)", PackageReference=32A, PackageVersion="revC, Oct-2010", RevisionNote="DatasheetVersion & PackageVersion updated. URLs added."
U2: library part CMP-2000-05075-1, "Intelligent 9-Axis Absolute Orientation Sensor, 1.7 V to 3.6 V, -40 to 85 degC, 28-Pin LGA, RoHS, Tape and Reel", Manufacturer="Bosch Sensortec", Datasheet URL=http://datasheet.octopart.com/BNO055-Bosch-datasheet-45840915.pdf, Datasheet Version="Rev. 1.3, 08/2015", Manufacturer URL=http://www.bosch-sensortec.com
U3: library part CMP-0062-01890-1, "Micropower 50 mA Ultra Low-Dropout Regulator, 5-pin SOT-23", Manufacturer="National Semiconductor", MPN=LP2982AIM5-3.3/NOPB, PackageTopMarking=L19A*XTT, PowerWise=N, CompType="LDO IC", DatasheetVersion=Feb-2006, PackageDescription="Molded SOT-23, .115 x .063 x .040 in Body, 5 Lead, .0375 in Pitch", PackageReference=MF05A, PackageVersion="revD, Aug-2008", PinCount=5, RoHS=N, URL=https://www.digikey.com/product-detail/en/texas-instruments/LP2982AIM5-3.3-NOPB/LP2982AIM5-3.3-NOPBCT-ND/364560
U4: library part CMP-0069-00173-2, "3A Step-Down Voltage Regulator with Adjustable Current Limit, 7-pin TO-263", Manufacturer="Texas Instruments", MPN=LM2673S-5.0/NOPB, PackageTopMarking=NSUZXYTTE#*LM2673*S-5.0, PowerWise=N, Code_JEDEC=MO-169-AC, ComponentLink1Description="LM2673 Datasheet", ComponentLink1URL=http://www.national.com/ds/LM/LM2673.pdf, ComponentLink2Description="LM2673 Web Page", ComponentLink2URL=http://www.national.com/pf/LM/LM2673.html, ComponentLink3Description="TS7B Package Page", ComponentLink3URL=http://www.national.com/packaging/folders/ts7b.html, CompType=Switcher, DatasheetVersion=Feb-2008, PackageDescription="TO-263, Molded, .400 x .390 x .180in Body, 7 Lead, .050in Pitch, Surface Mount", PackageReference=TS7B, PackageVersion="revE, Jul-2003", PinCount=7, RevisionNote="Component URLs added", RoHS=N, URL=https://www.digikey.com/product-detail/en/texas-instruments/LM2673S-5.0/LM2673S-5.0-ND/3701220
X1: library part CMP-2000-06128-1, "Crystal, 16 MHz, 8 pF, -10 to 70 degC, 4-Pin SMD, RoHS, Tape and Reel", Frequency Stability=15PPM, Load Capacitance=8pF, Manufacturer=AVX, MPN=CX2520DB16000D0GEJCC, Operating Temperature Range=-10Cto+70C, Package / Case=2.5mmx2mm, Package Description="4-Pin Surface Mount Device, Body 2.5 x 2 mm, Pitch 1.7 mm", Package Reference=CX2520DB, Brand=AVX/Kyocera, Datasheet URL=http://www.kyocera-crystal.jp/eng/wp-content/uploads/2014/12/cx2520db_e.pdf, Datasheet Version=09/2015, Drive Level=10uW, ESR=80Ohms, Factory Pack Quantity=3000, Frequency=16MHz, Height=0.5mm, Length=2.5mm, Manufacturer URL=http://global.kyocera.com/, Mounting Style=SMD/SMT, Mounting Technology=SurfaceMount, Packaging=Reel, Product Category=Crystals, Qualification=AEC-Q200, RoHS=True, Series=CX2520DB, Termination Style=SMD/SMT, Tolerance=15PPM, Type=SMDCrystal, Unit Weight=0.000459oz, Width=2mm

## Via types
v1: diameter 15, hole 10, Top Layer to Bottom Layer, tented both sides, 63 vias

## Nets (pads, with @x,y where several pads share a name; then routed paths per layer and width w, separated by ;. In a path a pad name is that pad's centre, name@x,y a point inside that pad or via, vN(x,y) a via of type N, cw(c..) or ccw(c..) an arc to the next point about the centre after c; other vN are vias at no path point)
3V3: C8.2 C9.2 C10.2 C17.2 J2.2 R6.2 R7.2 R8.1 R9.1 U2.3 U2.28 U3.5 | length 2837.2
  Top Layer w6: C9.2 1415,4709.84 1407.66,4702.5 1407.66,4642.93 1414.98,4635.61 1429.7,4635.61 U2.3 ; U2.28 C8.2@1448.7,4724.41
  Top Layer w10: J2.2 1362.22,4250 1384.72,4227.5 1597.6,4227.5 1600.81,4224.29 1980.71,4224.29 2135,4070 2310,4070 2330,4090 2330,4129.35 2300.08,4159.27 2300.08,4183.62 2291.3,4192.4 U3.5 2279.49,4259.37 C17.2 ; 1424.86,4729.86 C8.2@1454.15,4729.86 ; C8.2@1448.7,4724.41 C8.2@1454.15,4729.86 ; v1@1451.97,4799.25 1475.39,4799.25 1500,4774.64 1500,4760.55 1508.74,4751.81 C10.2 ; R6.2 R7.2 R8.1 R9.1 1672.91,4872.28 1527.28,4872.28 1515.39,4860.39 1515.39,4746.65 C10.2 ; C8.2@1454.15,4729.86 C8.2 1499.45,4730.71 C10.2
  Bottom Layer w10: J2.2 1295,4305 1295,4475.68 1285,4485.68 1285,4504.32 1295,4514.32 1295,4688.64 1331.36,4725 1373.18,4725 1375.68,4722.5 1394.32,4722.5 1396.82,4725 1430,4725 1451.97,4746.97 v1(1451.97,4801.75)
+5: C1.2 C2.2 C3.2 C4.2 C11.1 C12.1 C13.1 C15.1 C16.2 HL.2 ICSP.1 L2.2 R5.1 U1.4 U1.6 U1.18 U1.20 U3.1 U3.3 U4.6 | length 5277.2
  Top Layer w10: R5.1 1450.77,4207.5 1589.32,4207.5 1594.32,4202.5 1947.5,4202.5 2037.5,4112.5 ; U1.6 1810,4457.76 ; U1.4 1797.94,4520.75 1802.62,4516.06 1805.36,4516.06 1821.06,4500.36 1821.06,4468.82 1810,4457.76 ; v1(1875,4110) 2035,4110 2037.5,4112.5 ; U1.18 2104.93,4428.87 2137.92,4428.87 2155.71,4446.65 2155.71,4457.76 ; U1.20 1946.56,4489.25 1915.06,4457.76 1810,4457.76 ; 2140,4484.57 2155.71,4468.86 2155.71,4457.76 ; U3.3 2176.38,4126.22 2153.2,4126.22 2144.41,4135.01 2144.41,4174.99 2153.2,4183.78 2176.38,4183.78 U3.1 2173.19,4192.4 2142.5,4223.09 2142.5,4314.32 2160.68,4332.5 2172.07,4332.5 2213.58,4374.02 2235,4352.6 2235,4347.13 2239.63,4342.5 2242.87,4342.5 2242.87,4339.26 2251.66,4330.47 2282.71,4330.47 2325.68,4287.5 2344.32,4287.5 2360,4303.18 ; C1.2 C2.2 ; C3.2@2213.58,4505.39 C2.2 ; C3.2 C4.2 ; HL.2 2415,4805 2415,4405 2360,4350 2360,4303.18 ; 2037.5,4112.5 2100,4050 2320,4050 2360,4090 2360,4303.18 ; 2155.71,4457.76 2210.83,4457.76 C2.2
  Bottom Layer w10: ICSP.1 1250,4613.64 1205,4568.64 1205,4331.36 1231.36,4305 1258.64,4305 1305,4258.64 1305,4231.36 1442.5,4093.86 1442.5,3962.5 1485,3920 U4.6 1780,3920 1796.42,3936.42 1796.42,4026.81 1799.61,4030 ; C16.2 1799.61,4030 ; v1(1875,4110) 1875,4135 1897.87,4157.87 ; L2.2 1915.32,4129.45 1900.63,4144.13 1900.63,4155.12 1897.87,4157.87 ; 1799.61,4030 1833.62,4064.02 C11.1 C12.1 C13.1 1833.62,4243.03 C15.1 1854.21,4226.38 1854.21,4201.54 1897.87,4157.87
+12: C18.2 C19.2 C20.1 D2.2 ESC2.1 ESC2.2 ESC.1 ESC.2 Q1.5 U4.2 | length 4677.5
  Bottom Layer w10: D2.2@1502.52,4302.48 D2.2 ; ESC2.1@1575,4825.54 1544.37,4842.77 1531.59,4849.96 ESC2.1@1585,4880 ; C19.2@1846.22,4391.22 C19.2 C19.2@1846.22,4475 ; Q1.5 Q1.5@2378.54,4386.89 ; ESC.1@2350.43,4630.43 ESC.1 ; C20.1@2378.54,4255.08 C20.1
  Bottom Layer w20: D2.2@1502.52,4302.48 1420,4385 1420,4630 1455,4665 1478.89,4665 1524.45,4619.45 1553.89,4590 1575,4590 1575,4635 ESC2.1@1575,4825.54 ; D2.2 1515,4176.11 1558.61,4132.5 1642.5,4132.5 1693.54,4183.54 1693.54,4286.75 1705.26,4298.46 1777.36,4298.46 1846.22,4367.33 C19.2@1846.22,4391.22 ; ESC2.1@1585,4880 1615,4880 1665,4930 2260,4930 ESC.2 2330,4810 2330,4690 2355,4665 ESC.1 ; U4.2 1770,3720 1840,3650 1840,3610 1870,3580 2365,3580 2450,3665 2450,4183.62 C20.1@2378.54,4255.08 ; C19.2@1846.22,4475 C18.2@1903.78,4475 ; Q1.5 2337.5,4427.93 2337.5,4617.5 ESC.1@2350.43,4630.43 ; C20.1 Q1.5@2378.54,4386.89
CE: J2.3 U1.11 | length 743.7
  Top Layer w10: J2.3 1258.64,4358.64 1295,4358.64 1331.36,4395 1380,4395 1487.5,4287.5 1622.46,4287.5 1625.67,4284.29 1867.37,4284.29 1883.07,4300 1883.07,4302.73 1887.76,4307.42 U1.11
CSN: J2.4 U1.12 | length 654.5
  Top Layer w10: J2.4 1396.72,4350 1479.22,4267.5 1614.17,4267.5 1617.38,4264.29 1878.86,4264.29 1916.65,4302.08 1916.65,4335.07 U1.12
ESC1: ESC.6 U1.1 | length 530.2
  Top Layer w10: U1.1 1811.58,4615.24 1872.5,4554.32 1872.5,4553.18 1885.68,4540 1930,4540 v1(1970,4580)
  Bottom Layer w10: v1(1970,4580) 1970,4755.44 2029.08,4814.53 ESC.6
ESC2: ESC.5 U1.13 | length 352
  Top Layer w10: v1(1950,4400) 1950,4338.43 U1.13
  Bottom Layer w10: v1(1950,4400) 1952.5,4402.5 1989.32,4402.5 2020,4433.18 2020,4625.92 ESC.5
ESC3: ESC2.5 U1.9 | length 835.4
  Top Layer w6: v1@1708.85,4367.5 1708.85,4369.23 1709.62,4370 1807.72,4370 1810.22,4367.5
  Top Layer w10: 1810.22,4367.5 1824.76,4352.96 U1.9
  Bottom Layer w6: 1640,4554.9 1640,4595.38 1635,4600.38 1635,4671.34 1640,4676.34 1640,4716.82
  Bottom Layer w10: 1640,4554.9 1715,4479.9 1715,4375.86 1712.21,4375.86 1706.35,4370 v1(1705,4370) ; 1640,4716.82 1670.68,4747.5 1832.5,4747.5 1865.92,4780.92 ESC2.5
ESC4: ESC2.6 U1.10 | length 465.3
  Top Layer w10: U1.10 1856.26,4367.94 1860.94,4372.62 1860.94,4375.36 1930.59,4445 v1(1945,4445)
  Bottom Layer w10: ESC2.6 1865.92,4650.92 1895,4680 1945,4630 v1(1945,4445)
GND: *.1 C1.1 C2.1 C3.1 C4.1 C5.1 C6.2 C7.2 C8.1 C9.1 C10.1 C11.2 C12.2 C13.2 C15.2 C16.1 C17.1 C18.1 C19.1 C20.2 C21.1 D1.1 DS1.1 DS2.2 DS3.2 DS4.2 ESC2.3 ESC2.4 ESC.3 ESC.4 HL.1 ICSP.3 J2.1 R10.1 R11.1 RESET.3 RESET.4 U1.3 U1.5 U1.21 U2.2 U2.5 U2.6 U2.15 U2.16 U2.18 U2.25 U3.2 U4.4 U4.8 X1.2 | length 7581.5
  Top Layer w6: U2.6@1426.81,4565.43 1409.57,4565.43 v1(1380,4595) U2.5@1429.06,4595 ; U2.5 1444.72,4595.94 1451.84,4603.06 1451.84,4648.16 1445,4655 ; U2.2 1445,4655 ; U2.25 1507.46,4685.22 1507.46,4666.55 ; v1(1535,4370) v1(1535,4370) 1534.96,4385 1530,4389.96 1530,4490.04 1535.51,4495.55 1535.51,4505 C6.2@1558.43,4505 ; U2.16@1603.31,4597.83 1592.12,4597.83 1571.95,4618 1571.95,4635.31 ; U2.15 U2.16@1606.18,4593.74 ; U2.16@1610,4595 1650,4555 1650.59,4555 1675,4530.59 1675,4481.35 v1@1676.35,4480 ; v1(1670,4620) 1654.69,4635.31 U2.18 1571.95,4635.31 ; 1445,4655 1495.91,4655 1507.46,4666.55 ; 1507.46,4666.55 1538.7,4635.31 1571.95,4635.31
  Top Layer w10: RESET.3 1257.01,4050.91 1257.01,4007.99 v1(1280,3985) ; v1(1385,4745) 1386.35,4745 1397.42,4756.06 1413.07,4756.06 C9.1 C9.1@1415,4758.78 ; v1(1410,4885) 1410,4850.79 DS2.2 ; U2.6@1426.81,4565.43 U2.6 ; U2.5@1429.06,4595 U2.5 ; C8.1 1447.76,4762.05 1418.27,4762.05 C9.1@1415,4758.78 ; C7.2 1476.3,4407.48 1490,4393.78 v1(1490,4370) ; DS3.2 1424.68,4845.47 DS2.2 ; v1(1505,4140) v1(1550,4185) ; v1(1545,4735) 1596.26,4735 C10.1 1601.26,4751.81 1587.5,4765.57 1587.5,4801.16 1612.98,4826.64 DS4.2@1615,4826.64 ; DS1.1 DS4.2@1618.66,4832.32 ; C6.2@1558.43,4505 C6.2 ; U2.16@1603.31,4597.83 U2.16 ; v1(1615,4790) DS4.2@1615,4826.64 ; DS4.2 DS4.2@1618.66,4832.32 ; C5.1 1626.57,4407.52 X1.2 1637.87,4410 v1(1675,4410) ; v1(1740,4080) 1790,4030 v1(1790,3835) ; U1.5@1752.55,4489.25 1685.61,4489.25 1676.35,4480 1676.35,4493.92 1730,4547.56 1732.73,4547.56 1737.42,4552.24 U1.3 ; U1.21 2102.7,4520.37 2164.63,4520.37 v1(2165,4520) ; v1(2120.24,4745.31) 2160,4785.08 HL.1 ; U3.2 2193.62,4163.62 2216.8,4163.62 2225.59,4172.41 2225.59,4259.41 C17.1 2241.65,4276.65 2241.65,4290.98 2254.72,4304.04 2274.04,4304.04 v1(2275,4305) ; C3.1 C4.1 ; v1(2335,4310) 2334.04,4310.96 2334.04,4326.39 2286.42,4374.02 C1.1 C2.1 2286.42,4505.39 2360.39,4505.39 v1(2380,4525) ; v1(2355,3905) 2440,3990 v1(2440,4250) ; C9.1@1415,4758.78 1415,4835.79 DS2.2 ; DS4.2@1615,4826.64 1615,4828.66 DS4.2@1618.66,4832.32
  Bottom Layer w6: v1(1490,4370) v1(1535,4370)
  Bottom Layer w10: ICSP.3 1302.49,4832.49 1366.12,4832.49 1409.04,4875.4 1409.04,4884.04 v1(1410,4885) ; v1(1280,3985) 1326.26,3938.74 D1.1 1390,3922.99 1418.46,3894.53 1493.35,3894.53 1510,3877.87 R11.1 1510,3862.13 1543.7,3828.43 1675.35,3828.43 U4.4 1697.48,3833.7 1787.35,3833.7 1788.65,3835 v1(1790,3835) ; v1(1380,4595) 1380,4618.28 1496.72,4735 v1(1545,4735) ; v1(1505,4140) 1515,4140 1547.5,4107.5 1644.32,4107.5 1665,4086.82 C16.1@1665,4047.4 ; C21.1 1511.46,3974.92 1532.87,3996.34 1532.87,4001.8 1542.21,4011.14 C16.1@1650,4011.14 ; v1(1550,4185) 1550,4214.25 1590,4254.25 R10.1 ; R10.1@1593.86,4259.92 1605.07,4259.92 1623.78,4278.63 C19.1 1623.78,4400.24 1633.54,4410 v1(1675,4410) v1(1675,4480) ; v1(1615,4790) 1616.35,4790 1628.05,4801.69 1706.69,4801.69 ESC2.3 ; C16.1 1665,4046.42 C16.1@1665,4047.4 ; v1(1670,4620) 1725,4620 ESC2.4 ; C15.2 1755.79,4226.38 1755.79,4196.57 1786.38,4165.98 C13.2 C12.2 ; v1(1740,4080) 1763.27,4103.27 1775.63,4103.27 C12.2@1786.38,4114.02 ; C11.2 C12.2@1786.38,4114.02 ; U4.8@2105.83,3770 U4.8 2270,3820 v1(2355,3905) ; v1(2120.24,4745.31) 2120.24,4800.24 ESC.4 ; v1(2275,4305) 2328.65,4305 2333.65,4310 v1(2335,4310) 2335,4273.54 C20.2 ; v1(2380,4525) 2445,4525 2452.05,4517.95 2452.05,4322.17 2440,4310.13 v1(2440,4250) ; C16.1@1665,4047.4 1732.6,4115 C12.2 ; C12.2@1786.38,4114.02 C12.2
  Bottom Layer w20: U4.8@2100.83,3695 *.1@2325.94,3695 ; U4.8@2105.83,3770 2330.94,3770 *.1 ; U4.8@2110.83,3725 *.1@2335.94,3725
I2C_SEL: U1.2 U2.17 | length 214.3
  Top Layer w6: U2.17 1624.37,4615.63 1667,4573 1667,4559.01 1679.01,4547 1701.48,4547 1738.22,4583.74 U1.2
INT: U1.32 U2.14 | length 769.1
  Top Layer w6: v1(1472.34,4600) 1565,4600 1586.2,4578.8 1586.2,4565.73 U2.14
  Top Layer w7: 1654.19,4765 1703.97,4765 1717.47,4751.5 1743.5,4751.5 1750,4745
  Top Layer w10: v1(1640,4779.19) 1654.19,4765 ; 1750,4745 1750,4718.97 1775.07,4693.9 1818.47,4693.9 1824.76,4687.61 U1.32
  Bottom Layer w6: 1596.21,4570 1596.21,4573.54 1602.5,4579.82 1602.5,4690.18 1596.21,4696.46 1596.21,4729.6
  Bottom Layer w10: v1(1472.34,4600) 1472.34,4581.44 1483.79,4570 1596.21,4570 ; 1596.21,4729.6 1640,4773.39 v1(1640,4779.19)
MISO: ICSP.4 J2.7 U1.16 | length 2518.8
  Top Layer w10: v1(1220,4720) 1195,4695 1195,4646.77 1246.77,4595 1246.77,4553.23 J2.7 1305,4495 v1(1307.5,4495) ; ICSP.4@1341.36,4771.36 ICSP.4 ; v1(1599.32,4062.5) 1626.82,4035 1645,4035 1715,4105 1830,4105 1900,4035 2340,4035 2385,4080 v1(2385,4195) ; U1.16 2050.06,4342.5 2142.4,4342.5 2153.94,4354.04 2159.04,4354.04 v1(2160,4355) ; v1(2165,4305) 2218.65,4305 2223.65,4310 v1(2225,4310)
  Bottom Layer w10: v1(1220,4720) 1221.35,4720 1236.35,4735 1305,4735 ICSP.4 ; v1(1307.5,4495) 1368.64,4495 1395,4468.64 1395,4208.18 1540.68,4062.5 v1(1599.32,4062.5) ; v1(2160,4355) 2160,4311.35 2165,4306.35 v1(2165,4305) ; v1(2225,4310) 2225.96,4309.04 2225.96,4288.03 2318.98,4195 v1(2385,4195)
MOSI: ICSP.2 J2.6 U1.15 | length 1392.7
  Top Layer w10: v1(1320,4590) 1320,4588.65 1305,4573.65 1305,4531.36 1341.36,4495 1341.36,4458.64 J2.6 1341.36,4441.36 1305,4441.36 1268.64,4405 1230,4405 1205,4380 1205,4331.36 1241.36,4295 1399.65,4295 1447.15,4247.5 1605.89,4247.5 1609.1,4244.29 1953.35,4244.29 2009.06,4300 2009.06,4302.73 2013.74,4307.42 U1.15
  Bottom Layer w10: v1(1320,4590) 1320,4644.45 1350,4674.45 ICSP.2
nBootloader: R9.2 U1.31 U2.4 | length 2871.7
  Top Layer w6: v1(1305,4910) 1305,4650 1339.37,4615.63 U2.4
  Top Layer w10: v1(1260,4130) 1290,4130 1302.5,4117.5 1302.5,4105.26 1387.76,4020 1476.82,4020 1541.82,4085 v1(1550,4085) ; v1(1625,4160) 1625,4116.35 1640,4101.35 v1(1640,4080) ; R9.2 1694.92,4810.63 1713.54,4792.01 1716.46,4792.01 1716.46,4780.79 1725.24,4772.01 1736.46,4772.01 1738.46,4770 1760,4770 1783.14,4746.86 1814.72,4746.86 1853.65,4707.92 1853.65,4674.93 U1.31 1856.26,4603.74 1895,4565 v1(1895,4562.5)
  Bottom Layer w6: v1(1625,4160) 1671.04,4206.04 1671.04,4299.6 1700.48,4329.04 1739.04,4329.04 ; 1740,4330 1760,4350 1760,4485
  Bottom Layer w10: v1(1260,4130) 1241.72,4130 1165,4206.72 1165,4895 1200,4930 1285,4930 v1(1305,4910) ; v1(1550,4085) 1551.35,4085 1553.85,4087.5 1607.6,4087.5 1615.1,4080 v1(1640,4080) ; 1760,4485 1820,4545 1875,4545 1892.5,4562.5 v1(1895,4562.5)
NetC5_2: C5.2 U1.8 X1.1 | length 316.2
  Top Layer w10: X1.1 1573.43,4407.52 C5.2 1589.09,4344.33 1589.09,4334.93 1599.69,4324.33 1653.46,4324.33 1662.5,4333.37 1662.5,4359.32 1697.94,4394.76 U1.8
NetC6_1: C6.1 U1.7 X1.3 | length 275.5
  Top Layer w10: X1.3@1626.57,4472.48 C6.1 1626.57,4473.43 1649.09,4450.91 1665.81,4450.91 1679.95,4436.76 1680.06,4436.76 1689.32,4427.5 1766.44,4427.5 U1.7 ; X1.3 X1.3@1648.15,4450.91
NetC7_1: C7.1 U2.9 | length 70.8
  Top Layer w6: C7.1 1488.07,4513.07 U2.9
NetC14_1: C14.1 U4.3 | length 123.4
  Bottom Layer w10: C14.1 1567.4,3770 U4.3
NetC14_2: C14.2 D1.2 L1.2 U4.1 | length 1215.7
  Top Layer w10: v1(1790,3640) 1860,3710 v1(1860,3730)
  Bottom Layer w10: D1.2 1406.26,3765 C14.2 1510.16,3742.44 1510.16,3738.94 1565.4,3683.7 1670.08,3683.7 U4.1 1697.48,3656.3 1773.7,3656.3 v1(1790,3640) ; v1(1860,3730) 1860,4015.47 1895.99,4051.46 2070.9,4051.46 2095.76,4076.32 2095.76,4090.45 2135.32,4130 L1.2@2155,4130
NetC21_2: C21.2 U4.7 | length 115.2
  Bottom Layer w10: C21.2 U4.7
NetD2_1: D2.1 Q1.4 R10.2 | length 1674.7
  Bottom Layer w6: 1620,4565.5 1620,4725.1
  Bottom Layer w10: R10.2 1590,4412.52 D2.1 1515,4493.43 1553.31,4531.73 1586.23,4531.73 1620,4565.5 ; 1620,4725.1 1675,4780.1 1680.1,4775 1794.14,4775 1810,4790.86 1810,4872.75 1837.25,4900 2211.21,4900 2225,4886.21 2225,4495.83 2219.17,4490 Q1.4
NetDS1_2: DS1.2 R1.2 | length 1779.1
  Top Layer w10: v1(1510,4905) 1545,4905 DS1.2 ; R1.2 2294.45,4680 2325,4680 2365,4640 v1(2365,4555)
  Bottom Layer w10: v1(1510,4905) 1450.91,4905 1440,4915.91 1440,4936.82 1478.18,4975 2370,4975 2445,4900 2445,4603.79 2396.21,4555 v1(2365,4555)
NetDS2_1: DS2.1 R2.2 | length 1344.4
  Top Layer w10: DS2.1@1415,4924.21 1430.79,4940 v1(1475,4940) ; R2.2 2325,4765 v1(2370,4720)